# Altium PCB PCB1.PcbDoc
Units mm, origin at the board's own origin, x right, y up, seen from the top; angles counter-clockwise.
Board outline 39.5 x 21.5 mm, 2 copper layers (Top Layer, Bottom Layer); 7 components, 4 nets, 23 pads, 0 vias.
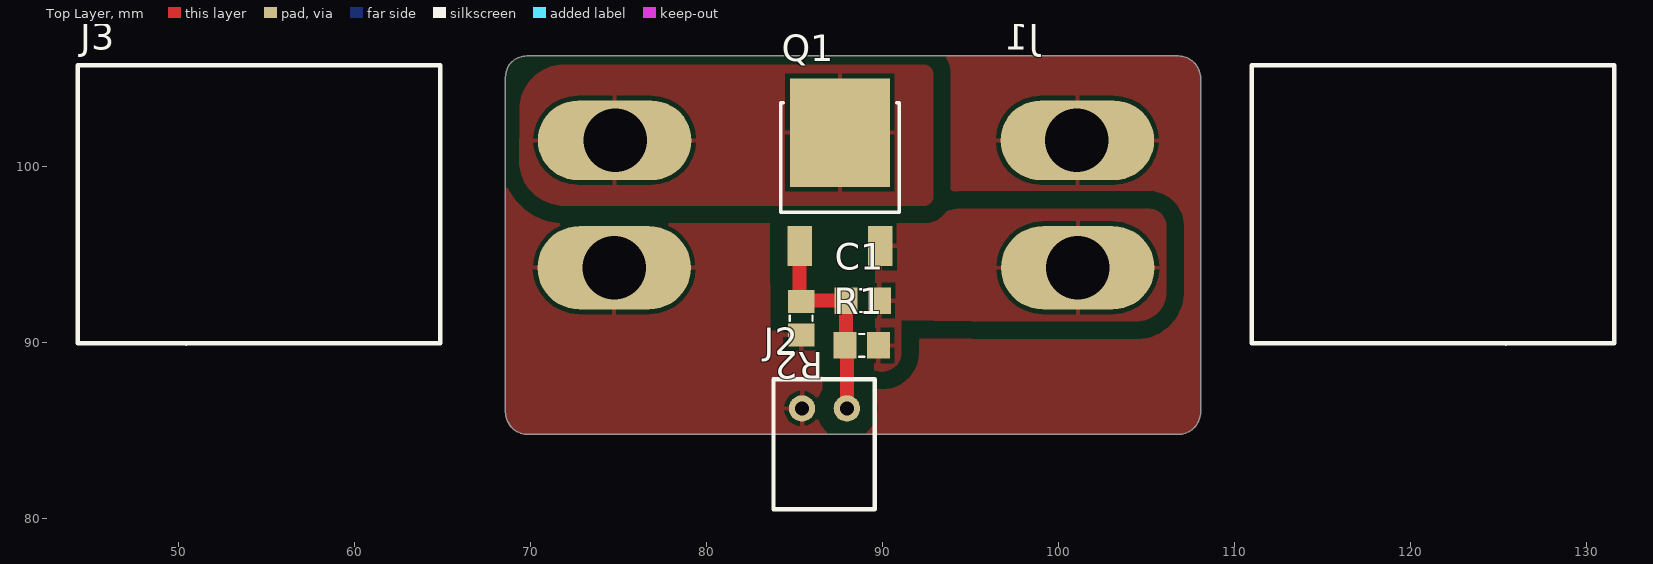
[diagram p0: Top Layer view]
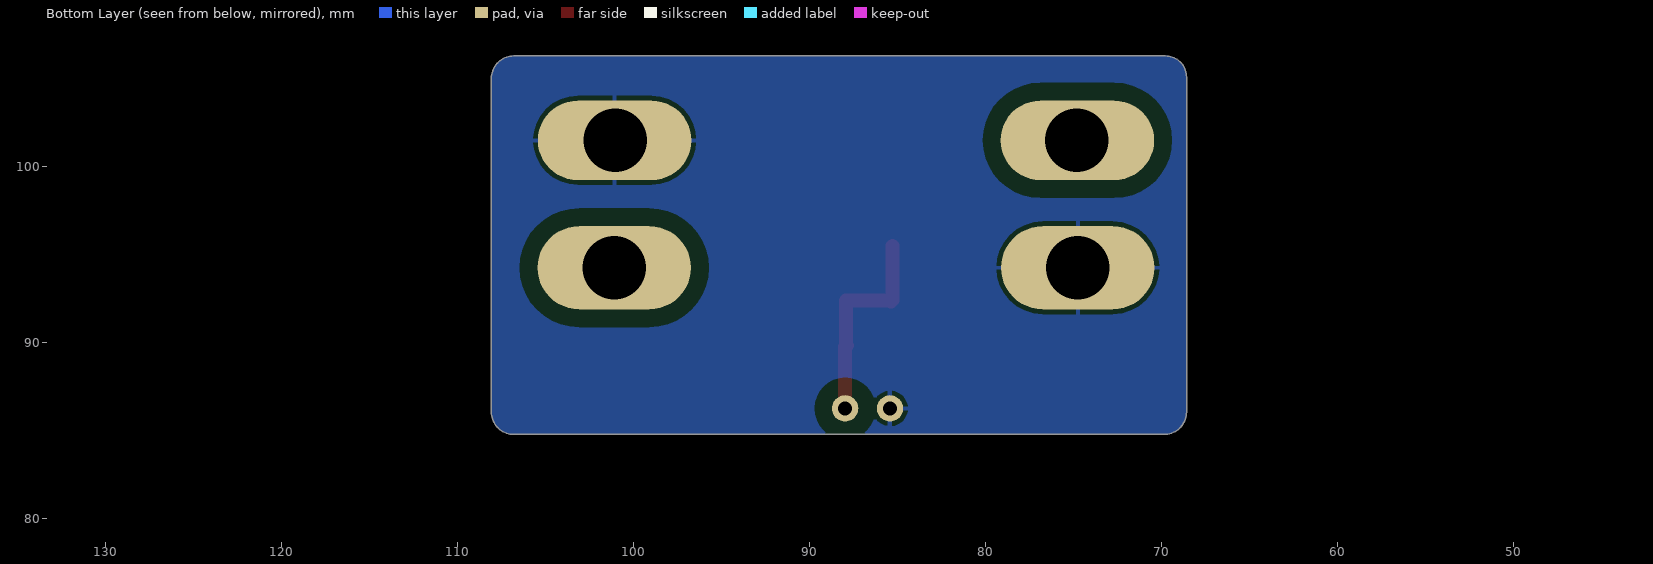
[diagram p1: Bottom Layer view, seen from below]

## Layer stack, top to bottom
Top Solder: solder mask 0.0102, Solder Resist, Dk 3.5
Top Layer: signal copper 0.0356
Dielectric 1: dielectric 0.32, FR-4, Dk 4.8
Bottom Layer: signal copper 0.0356
Bottom Solder: solder mask 0.0102, Solder Resist, Dk 3.5

## Board outline
68.6,86.07 68.6,105.1 cw(c69.8,105.1) 69.8,106.3 106.83,106.3 cw(c106.83,105.03) 108.1,105.03 108.1,86.07 cw(c106.83,86.07) 106.83,84.8 69.87,84.8 cw(c69.87,86.07)

## Design rules (kind name [scope] priority, off if disabled: settings)
Clearance [All] p1: gap=1 ignorepadtopadclearanceinfootprint=FALSE except(0: Arc-Hole Track-Hole SMDPad-Hole THPad-Hole Via-Hole Fill-Hole Poly-Hole Region-Hole Text-Hole; 0.6: Arc-SMDPad Track-SMDPad SMDPad-SMDPad)
PolygonConnect [All] p1: connectstyle=Relief reliefconductorwidth=0.254 reliefentries=4 polygonreliefangle="90 Angle" airgapwidth=0.254
RoutingVias [All] p1: holewidth=0.711 width=1.27 viastyle="Through Hole" minholewidth=0.711 minwidth=1.27 maxholewidth=0.711 maxwidth=1.27
SolderMaskExpansion [All] p1: expansion=0.102 istentingtop=FALSE
Width [All] p1: maxlimit=1 minlimit=0.4 preferedwidth=0.6 minimp=50.000000 maximp=50.000000 favimp=50.000000
30 further rules are at their usual default settings.

## Components (designator, comment, footprint, x,y, rotation, side; value= is the part's Value field where it differs from the comment)
C1 "Cap" CAP0805 88.9,92.4 r0 top value=470nF
J1 "XT60 Connector" XT60_H#1 104.6,97.9 r90 top
J2 "JST 2P" JST_Horizontal 87.355,83.86 r0 top
J3 "XT60 Connector" XT60_H#2 71.3,97.9 r90 top
Q1 "SUD50P04-08-GE3" Vishay_T16-0236_MFG 87.6,99.7 r0 top
R1 "Res1" RES0805 88.85,89.857 r0 top value=10k
R2 "Res1" RES0805 85.4,91.4 r90 top value=2.2M

## Footprints (in the part's own frame and the unit in brackets; to place one, negate y for a bottom-side part, rotate by r counter-clockwise, add the part's x,y. Pads: shape width x height; smd on the part's side, far side on the other; paste and mask are expansions set on the pad)
CAP0805 [mm]
  rect 1.3x1.5 smd: 1(-0.95,0) 2(0.95,0)
  silkscreen extent -0.15,-0.65 0.15,0.65, body extent -1.1,-0.78 1.2,0.78, height 0.96
JST_Horizontal [mm]
  round 1.5 hole 0.8: 1(-1.905,2.413) 2(0.645,2.413)
  silkscreen extent -3.53,-3.32 2.22,4.08, body extent -4.33,-6.77 3.07,4.73, height 5.95
RES0805 [mm]
  rect 1.3x1.5 smd: 1(-0.95,0) 2(0.95,0)
  silkscreen extent -0.15,-0.65 0.15,0.65, body extent -1,-0.6 1,0.6, height 0.65
Vishay_T16-0236_MFG [mil]
  rect 55x90 smd paste+0 mask+0: 1(-90,-165) 3(90,-165)
  rect 224.02x243.31 smd paste+0 mask+0: 4(0,88.35)
  silkscreen extent -132,-90 132,155, body extent -136,-214 136,214, height 10
XT60_H#1 [mil]
  oval 185.98x343.46 smd: 1(-143,137)
  round 60 hole 141.73: 1(-143,137) 2(142,139)
  oval 185.98x343.46 smd far side: 1(-143,137)
  oval 178.11x343.46 smd: 2(142,138)
  oval 178.11x343.46 smd far side: 2(142,138)
  silkscreen extent -313,-1063 310,-252, body extent -315,-1063 311,-228, height 338
XT60_H#2 [mil]
  oval 185.98x343.46 smd: 1(-143,-137)
  round 60 hole 141.73: 1(-143,-137) 2(142,-139)
  oval 185.98x343.46 smd far side: 1(-143,-137)
  oval 178.11x343.46 smd: 2(142,-138)
  oval 178.11x343.46 smd far side: 2(142,-138)
  silkscreen extent -313,252 310,1063, body extent -315,228 311,1063, height 338

## Part data
C1: "Capacitor", LatestRevisionDate=17-Jul-2002, LatestRevisionNote="Re-released for DXP Platform.", PackageDescription="Radial Cap, Thru-Hole; 2 Leads; 0.3 in Pin Spacing", PackageReference=RAD-0.3, Published=8-Jun-2000, Publisher="Altium Limited"
J1 J3: library part XT60
J2: library part JST
R1 R2: "Resistor", LatestRevisionDate=17-Jul-2002, LatestRevisionNote="Re-released for DXP Platform.", PackageDescription="Axial Device, Thru-Hole; 2 Leads; 0.3 in Pin Spacing", PackageReference=AXIAL-0.3, Published=8-Jun-2000, Publisher="Altium Limited"

## Nets (pads, with @x,y where several pads share a name; then routed paths per layer and width w, separated by ;. In a path a pad name is that pad's centre, name@x,y a point inside that pad or via, vN(x,y) a via of type N, cw(c..) or ccw(c..) an arc to the next point about the centre after c; other vN are vias at no path point)
GND: J1.2 J2.1 J3.1 R2.1
NetC1_1: C1.1 J2.2 Q1.1 R1.1 R2.2 | length 12
  Top Layer w0.8: Q1.1 85.314,92.436 R2.2 85.45,92.4 C1.1 87.95,89.907 R1.1 88,89.757 J2.2
NetJ3_2: J3.2 Q1.4
Pil+: C1.2 J1.1 Q1.3 R1.2

## Polygon pours and split planes (outlines as drawn)
Pil+ on Top Layer "PIL+_L01_P074" (solid, pour order 74): 88.7,96.17 cw(c89.2,96.17) 89.2,96.67 90.6,96.67 cw(c90.6,96.17) 91.1,96.17 91.1,89.47 cw(c90,89.47) 90,88.37 cw(c90,89.67) 88.7,89.67
GND on Top Layer "Top Layer-No Net" (solid, pour order 87): 68.6,86.07 68.6,105.1 cw(c69.8,105.1) 69.8,106.3 106.83,106.3 cw(c106.83,105.03) 108.1,105.03 108.1,86.07 cw(c106.83,86.07) 106.83,84.8 69.87,84.8 cw(c69.87,86.07)
no net on Top Layer "NONET_L01_P083" (solid, pour order 83): 39.9,100.3
no net on Top Layer "NONET_L01_P079" (solid, pour order 79): 88.8,86.4
Pil+ on Top Layer "PIL+_L01_P075" (solid, pour order 75): 95.281,91.219 104.458,91.219 ccw(c104.458,92.919) 106.158,92.919 106.158,96.619 ccw(c105.158,96.619) 105.158,97.619 95.758,97.619 ccw(c95.69,91.879) 95.644,97.62 cw(c94.394,293.789) 94.371,97.616 ccw(c94.371,95.89) 93.571,97.419 cw(c92.273,99.902) 92.273,97.1 cw(c92.274,269.739) 90.356,97.111 ccw(c90.339,95.585) 88.858,95.219 ccw(c88.858,94.82) 88.858,94.42 88.858,93.004 ccw(c91.031,92.444) 89.1,91.3 95.125,91.237 ccw(c95.281,91.919)
no net on Top Layer "NONET_L01_P073" (solid, pour order 73): 94.2,94.7
no net on Top Layer "NONET_L01_P071" (solid, pour order 71): 89.3,97
no net on Top Layer "NONET_L01_P070" (solid, pour order 70): 67.9,102.3
NetJ3_2 on Top Layer "NETJ3_2_L01_P069" (solid, pour order 69): 69.4,101.6 69.4,103.26 cw(c71.94,103.26) 71.94,105.8 92.4,105.8 cw(c92.4,105.3) 92.9,105.3 92.9,98.3 cw(c92.4,98.3) 92.4,97.8 71.933,97.8 cw(c71.933,100.34) 69.393,100.34 69.393,101.595
no net on Top Layer "NONET_L01_P068" (solid, pour order 68): 70.3,98.7
no net on Top Layer "NONET_L01_P067" (solid, pour order 67): 71.1,106
no net on Top Layer "NONET_L01_P066" (solid, pour order 66): 50.4,123.8
no net on Top Layer "NONET_L01_P064" (solid, pour order 64): 84.4,98.4
no net on Top Layer "NONET_L01_P062" (solid, pour order 62): 32.3,126.1
no net on Top Layer "NONET_L01_P059" (solid, pour order 59): 63.8,93.8
no net on Top Layer "NONET_L01_P057" (solid, pour order 57): 62.6,100.5
no net on Top Layer "NONET_L01_P055" (solid, pour order 55): 86.439,97.168
no net on Top Layer "NONET_L01_P054" (solid, pour order 54): 92.2,97.4
no net on Top Layer "NONET_L01_P052" (solid, pour order 52): 86.439,97.168
no net on Top Layer "NONET_L01_P051" (solid, pour order 51): 86.439,99.962
no net on Top Layer "NONET_L01_P038" (solid, pour order 38): 86.9,91.4
no net on Top Layer "NONET_L01_P036" (solid, pour order 36): 84.2,98.6
no net on Top Layer "NONET_L01_P034" (solid, pour order 34): 60.8,93.2
no net on Top Layer "NONET_L01_P033" (solid, pour order 33): 60.8,93.2
no net on Top Layer "NONET_L01_P026" (solid, pour order 26): 80.5,101.5
no net on Top Layer "NONET_L01_P025" (solid, pour order 25): 79.4,108.9
no net on Top Layer "NONET_L01_P023" (solid, pour order 23): 78.9,104.2
no net on Top Layer "NONET_L01_P021" (solid, pour order 21): 67.7,117.2
no net on Top Layer "NONET_L01_P019" (solid, pour order 19): 61.5,92.5
no net on Top Layer "NONET_L01_P012" (solid, pour order 12): 82,109.4
no net on Top Layer "NONET_L01_P009" (solid, pour order 9): 62.3,94.8
no net on Top Layer "NONET_L01_P008" (solid, pour order 8): 71,87.7
no net on Top Layer "NONET_L01_P007" (solid, pour order 7): 64.7,88.1
no net on Top Layer "NONET_L01_P006" (solid, pour order 6): 65.9,88.6
no net on Top Layer "NONET_L01_P005" (solid, pour order 5): 61.6,86.4
GND on Bottom Layer "Top Layer-No Net1" (solid, pour order 88): 68.6,86.07 68.6,105.1 cw(c69.8,105.1) 69.8,106.3 106.83,106.3 cw(c106.83,105.03) 108.1,105.03 108.1,86.07 cw(c106.83,86.07) 106.83,84.8 69.87,84.8 cw(c69.87,86.07)

## Other copper
Top Layer:
  pour cut-out: 87.013,96.791 88.187,96.791 88.187,94.15 87.013,94.15

## Silkscreen, mask and mechanical layers (free items; w line width, h text height)
Mechanical 15:
  the board outline again, w0.127